# EAGLE board motorcontrol_v2 (EAGLE 6.5.0)
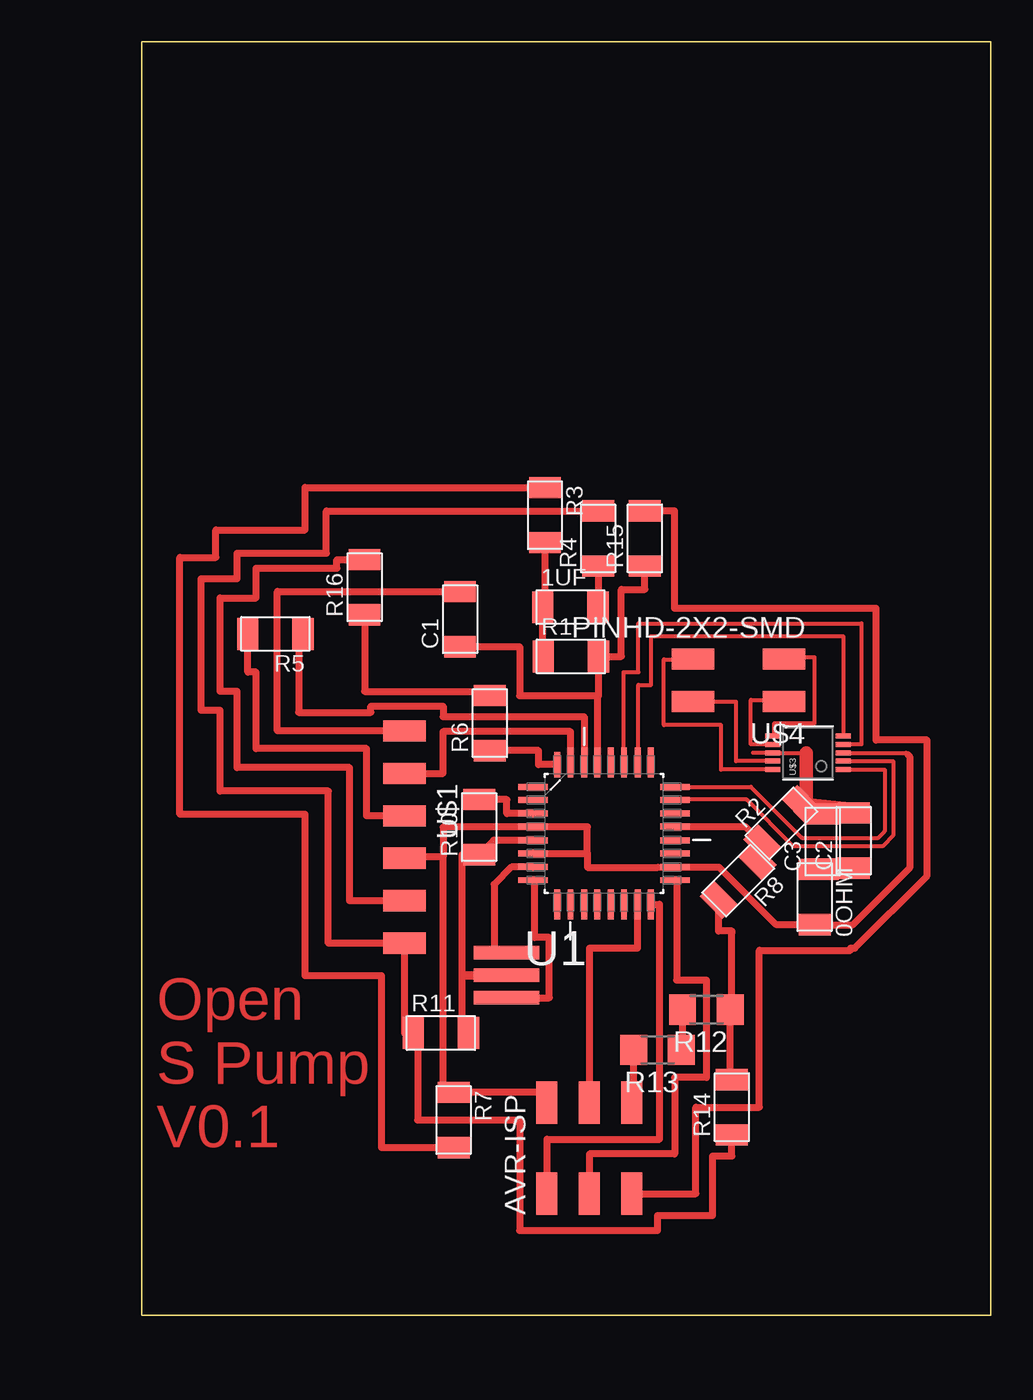
[diagram p0: board, top side]
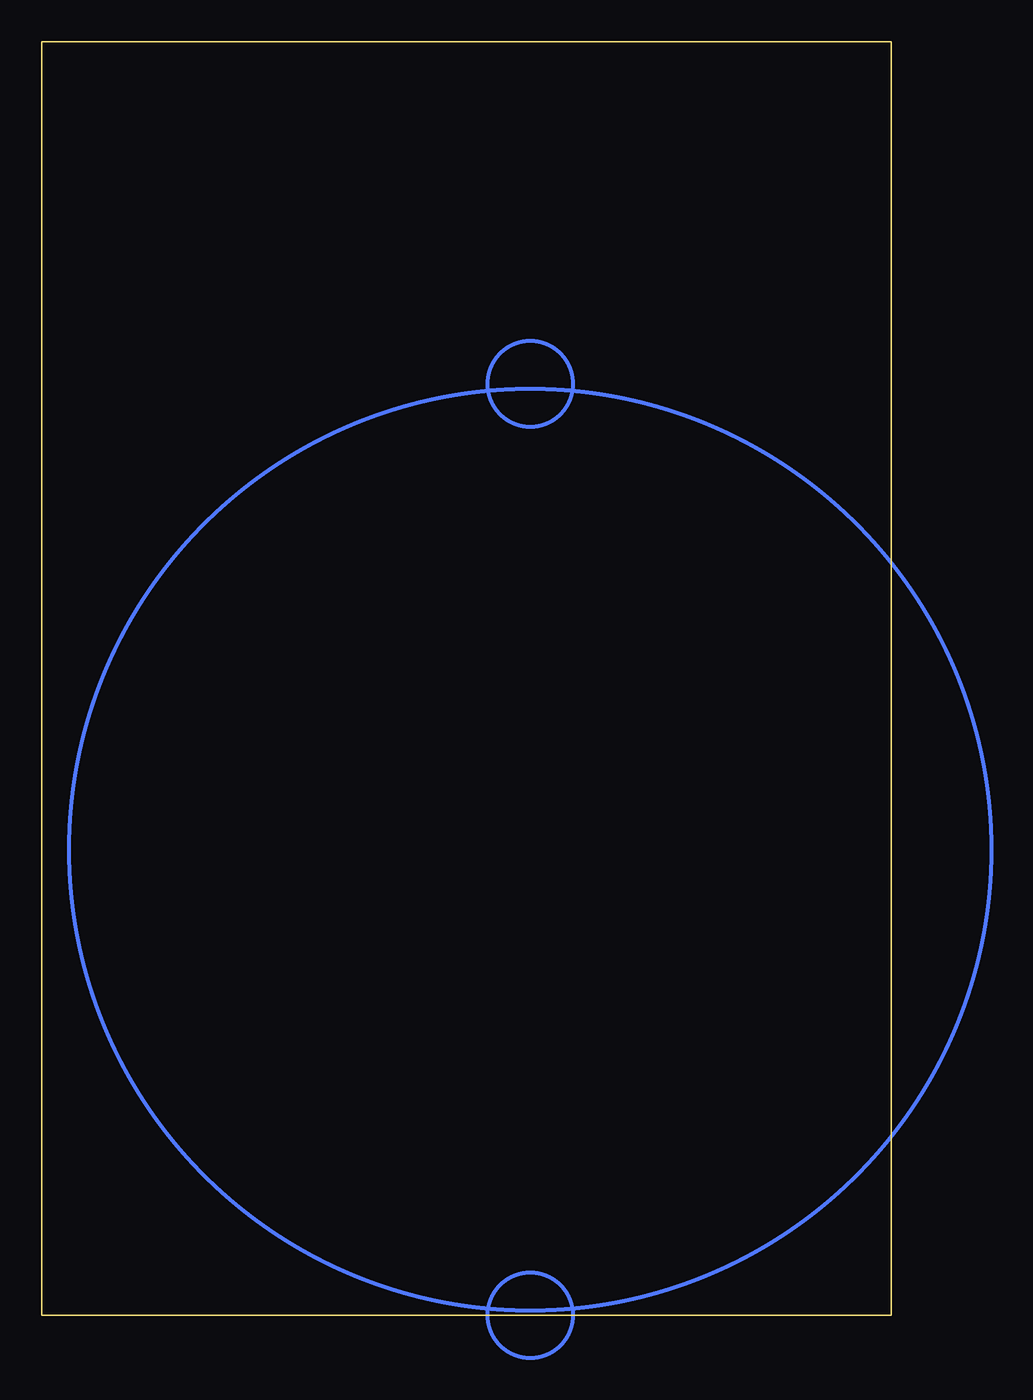
[diagram p1: board, bottom side, seen from below]

Size 50.8 x 76.2 mm. Coordinates in mm from the lower left corner, seen from the top.
Outline: 50.8,0 0,0 0,76.2 50.8,76.2 50.8,0
Copper layers (1*16): Top 0.035mm / dielectric 1.5mm / Bottom 0.035mm
Design rules "default *": minimum track width 10mil, minimum drill 24mil, track to track 16mil, track to pad 16mil, pad to pad 16mil, via to via 16mil, smd to smd 16mil, copper to edge 40mil, drill to drill 16mil, minimum pad ring 10mil, minimum via ring 8mil, stop-mask expansion 4mil, vias tented up to drill 0mil, thermal gap 10mil

## Footprints (pad centres in the part's own frame; a part is rotated, then mirrored left to right if it is on the bottom)
R1206FAB = smd 1.27 x 1.905: 1 -1.651,0; 2 1.651,0
C1206FAB = smd 1.27 x 1.905: 1 -1.651,0; 2 1.651,0
EFOBM = smd 0.8 x 3.9: 1 -1.35,0; 2 0,0; 3 1.35,0
2X03SMD = smd 2.54 x 1.27: 1 -2.54,2.54; 2 2.92,2.54; 3 -2.54,0; 4 2.92,0; 5 -2.54,-2.54; 6 2.92,-2.54
R1206 = smd 1.6 x 1.803: 1 -1.422,0; 2 1.422,0
QFP80P900X900X120-32N = smd 1.778 x 0.356: 1 -4.242,2.794; 2 -4.242,2.007; 3 -4.242,1.194; 4 -4.242,0.406; 5 -4.242,-0.406; 6 -4.242,-1.194; 7 -4.242,-2.007; 8 -4.242,-2.794; 17 4.242,-2.794; 18 4.242,-2.007; 19 4.242,-1.194; 20 4.242,-0.406; 21 4.242,0.406; 22 4.242,1.194; 23 4.242,2.007; 24 4.242,2.794 | smd 0.356 x 1.778: 9 -2.794,-4.242; 10 -2.007,-4.242; 11 -1.194,-4.242; 12 -0.406,-4.242; 13 0.406,-4.242; 14 1.194,-4.242; 15 2.007,-4.242; 16 2.794,-4.242; 25 2.794,4.242; 26 2.007,4.242; 27 1.194,4.242; 28 0.406,4.242; 29 -0.406,4.242; 30 -1.194,4.242; 31 -2.007,4.242 | smd 0.356 x 1.524: 32 -2.794,4.115
1X06SMD = smd 2.54 x 1.27: 1 0,6.35; 2 0,3.81; 3 0,1.27; 4 0,-1.27; 5 0,-3.81; 6 0,-6.35
MSOP_10 = smd 0.305 x 0.889: 1 -1,-2.11; 2 -0.5,-2.11; 3 0,-2.11; 4 0.5,-2.11; 5 1,-2.11; 6 1,2.11; 7 0.5,2.11; 8 0,2.11; 9 -0.5,2.11; 10 -1,2.11
2X02SMD = smd 2.54 x 1.27: 1 -2.54,1.27; 2 2.92,1.27; 3 -2.54,-1.27; 4 2.92,-1.27

## Placement (x,y rotation side)
0OHM  0  [R1206FAB]  40.26,25.02 270 top
1UF  1uF  [C1206FAB]  25.65,42.37 0 top
20MHZ  20MHZ  [EFOBM]  21.82,20.35 270 top
AVR-ISP  [2X03SMD]  26.78,9.82 90 top
C1  .1uF  [C1206FAB]  19.05,41.66 90 top
C2  .1uF  [C1206FAB]  42.6,28.4 90 top
C3  10uF  [C1206FAB]  40.74,28.35 90 top
R1  10K  [R1206FAB]  25.68,39.42 0 top
R2  0  [R1206FAB]  38.26,29.43 45 top
R3  0  [R1206FAB]  24.13,47.88 270 top
R4  0  [R1206FAB]  27.3,46.48 90 top
R5  0  [R1206FAB]  8,40.77 180 top
R6  0  [R1206FAB]  20.83,35.43 90 top
R7  0  [R1206FAB]  18.67,11.68 270 top
R8  0  [R1206FAB]  35.69,26.01 225 top
R10  0  [R1206FAB]  20.19,29.21 90 top
R11  0  [R1206FAB]  17.91,16.89 0 top
R12  0  [R1206]  33.78,18.29 180 top
R13  0  [R1206]  30.86,15.88 180 top
R14  0  [R1206FAB]  35.31,12.45 90 top
R15  0  [R1206FAB]  30.1,46.48 90 top
R16  0  [R1206FAB]  13.34,43.56 90 top
U1  ATMEGA328P-AU  [QFP80P900X900X120-32N]  27.66,28.83 0 top
U$1  FTDI-SMD-HEADER  [1X06SMD]  15.73,28.61 180 top
U$3  AD5290  [MSOP_10]  39.85,33.66 90 top
U$4  PINHD-2X2-SMD  [2X02SMD]  35.89,38 180 top

## Library data of the parts
0OHM 1UF 20MHZ AVR-ISP C1-C3 R1-R8 R10-R16 U$1 U$4 = fab
U1 = fab; DESCRIPTION: 8-bit Microcontroller with In-System Programmable Flash; MPN: ATMEGA328P-AU; OC_FARNELL: 1715486; OC_NEWARK: 14R4631; PACKAGE: TQFP-32; SUPPLIER: Atmel
U$3 = BillPorter

## Nets
CTS: R6.1 U1.32
GNA: 20MHZ.2 R10.1 R11.2 U1.5
GND: R4.2 R11.1 R14.1 U$1.1
GNDD: R8.2 R12.1 R14.2
GNDDD: R2.1 R8.1 U1.21
IN1A: U1.23 U$3.2
IN1B: U1.27 U$3.4
IN2A: U1.24 U$3.1
IN2B: U1.26 U$3.5
JUMP: AVR-ISP.5 R15.2
JUMP1: 0OHM.1 C2.1 C3.1
JUMP2: C2.2 C3.2 R2.2 U$3.8
MISO: AVR-ISP.1 U1.16
MOSI: AVR-ISP.4 U1.15
N$1: R5.2 U$1.4
N$2: R6.2 R16.1
N$3: 1UF.1 R1.1 R3.2
N$4: R3.1 R7.2
N$6: R10.2 U1.3
N$7: R16.2 U$1.2
N$8: AVR-ISP.6 R13.2
N$10: C1.2 U$1.6
N$12: 1UF.2 R4.1
N$13: R12.2 R13.1
OUT1A: U$3.6 U$4.3
OUT1B: U$3.9 U$4.2
OUT2A: U$3.7 U$4.1
OUT2B: U$3.10 U$4.4
R1: 20MHZ.1 U1.7
R2: 20MHZ.3 U1.8
RST: C1.1 R1.2 R15.1 U1.29
RX: R5.1 U1.30
SCK: AVR-ISP.3 U1.17
TX: U1.31 U$1.5
VCC: 0OHM.2 AVR-ISP.2 R7.1 U1.4 U1.6 U1.18 U$1.3 U$3.3

## Tracks (layer width: path | path; a pad name or v marks a point on that pad's centre or on a via)
CTS
  Top 0.406: U1.32 23.75,32.94 23.75,33.78 R6.1
GNA
  Top 0.406: U1.5 21.06,28.42 R10.1 19.18,27.56 19.18,20.35 | R11.2 19.18,16.89 19.18,20.32 | 19.18,20.32 21.82,20.32 20MHZ.2 19.18,20.35 | 19.18,20.35 19.18,20.32
GND
  Top 0.406: R4.2 11.05,48.13 11.05,45.59 5.71,45.59 5.71,44.07 3.56,44.07 3.56,36.2 4.7,36.2 4.7,31.37 11.18,31.37 11.18,22.26 U$1.1 15.73,16.89 R11.1 16.51,16.89 16.51,11.68 22.61,11.68 22.61,5.08 30.86,5.08 30.86,5.97 34.16,5.97 34.16,9.53 35.31,9.53 R14.1
GNDD
  Top 0.406: R14.2 35.2,14.1 R12.1 35.31,18.29 35.31,22.99 | 35.31,22.99 35.28,22.73 | 35.31,22.99 34.52,22.99 R8.2
GNDDD
  Top 0.406: R2.1 36.85,28 | R8.1 37.1,27.18 R2.1 | U1.21 36.12,29.23 R2.1
IN1A
  Top 0.254: U$3.2 44.95,33.16 44.96,33.15 44.96,28.7 44.32,28.07 38.99,28.07 36.2,30.86 31.93,30.86 U1.23
IN1B
  Top 0.254: U1.27 28.83,33.07 28.83,38.48 29.72,38.48 29.72,41.4 43.05,41.4 43.05,34.16 U$3.4
IN2A
  Top 0.254: U$3.1 44.45,32.66 44.45,28.96 44.07,28.57 39.5,28.57 36.45,31.62 U1.24
IN2B
  Top 0.254: U1.26 29.72,33.07 29.72,37.72 30.48,37.72 30.48,40.64 41.96,40.64 U$3.5
JUMP
  Top 0.406: AVR-ISP.5 33.15,7.28 33.15,12.45 36.96,12.45 36.96,21.84 42.42,21.84 42.42,21.97 42.67,21.97 46.99,26.29 46.99,34.42 43.94,34.42 43.94,42.29 31.88,42.29 31.88,48.13 R15.2
JUMP1
  Top 0.61: C3.1 42.55,26.7 C2.1 42.6,26.72 0OHM.1
JUMP2
  Top 0.254: 36.58,33.66 U$3.8 39.75,33.66
  Top 0.813: C2.2 42.98,30.23 R2.2 40.87,30.23 C3.2 39.75,30.5 39.75,33.66
MISO
  Top 0.406: AVR-ISP.1 24.26,7.28 24.26,10.54 30.99,10.54 30.99,24.59 U1.16
MOSI
  Top 0.406: AVR-ISP.4 26.8,12.74 26.8,21.97 29.67,21.97 U1.15
N$1
  Top 0.406: U$1.4 13.46,29.88 13.46,33.91 6.86,33.91 6.86,38.48 6.35,38.48 R5.2
N$2
  Top 0.406: R16.1 13.34,37.34 20.83,37.34 R6.2
N$3
  Top 0.406: R1.1 24,39.42 1UF.1 24.13,42.37 R3.2
N$4
  Top 0.406: R7.2 14.35,10.03 14.35,20.32 9.78,20.32 9.78,29.97 2.29,29.97 2.29,45.34 4.45,45.34 4.45,46.99 9.78,46.99 9.78,49.53 R3.1
N$6
  Top 0.406: U1.3 21.84,30.02 21.84,30.86 R10.2
N$7
  Top 0.406: U$1.2 12.45,24.8 12.45,32.77 5.71,32.77 5.71,37.34 4.7,37.34 4.7,42.93 6.86,42.93 6.86,44.7 11.68,44.7 11.68,45.21 R16.2
N$8
  Top 0.406: AVR-ISP.6 29.44,12.74 R13.2
N$10
  Top 0.406: U$1.6 8.13,34.96 8.13,43.31 C1.2
N$12
  Top 0.406: R4.1 1UF.2
N$13
  Top 0.406: R13.1 32.36,15.88 R12.2
OUT1A
  Top 0.254: U$3.6 37.85,34.66 37.85,35.43 40.26,35.43 40.26,39.37 38.43,39.37 U$4.3
OUT1B
  Top 0.254: U$3.9 35.56,33.16 35.56,36.7 32.97,36.7 U$4.2
OUT2A
  Top 0.254: U$3.7 36.45,34.16 36.45,36.83 38.43,36.83 U$4.1
OUT2B
  Top 0.254: U$3.10 34.67,32.66 34.67,35.31 31.24,35.31 31.24,39.24 32.97,39.24 U$4.4
R1
  Top 0.406: U1.7 22.12,26.82 21.08,25.78 21.08,21.84 20.95,21.72 21.81,21.72 20MHZ.1
R2
  Top 0.406: U1.8 23.5,26.04 23.5,22.61 24.38,22.61 24.38,19 20MHZ.3
RST
  Top 0.406: C1.1 22.61,40.01 22.61,37.08 27.25,37.08 | 27.3,37.08 27.33,37.08 R1.2 | R1.2 27.3,39.42 27.3,37.08 | 27.3,37.08 27.25,37.08 | 27.25,37.08 U1.29 | R1.2 28.7,39.42 28.7,43.43 30.1,43.43 R15.1
RX
  Top 0.406: R5.1 9.4,40.77 9.4,36.07 13.72,36.07 13.72,36.45 18.03,36.45 18.03,35.81 26.47,35.81 U1.30
SCK
  Top 0.406: U1.17 32,26.04 32,20.07 33.78,20.07 33.78,14.22 31.88,14.22 31.88,9.65 26.78,9.65 AVR-ISP.3
TX
  Top 0.406: U$1.5 18.03,32.42 18.03,34.92 25.65,34.92 U1.31
VCC
  Top 0.254: U$3.3 45.72,33.66 45.85,33.53
  Top 0.406: U1.6 26.67,27.64 | 26.67,27.64 26.67,26.8 30.89,26.8 U1.18 31.93,26.8 34.54,26.8 37.97,23.37 0OHM.2 42.55,23.37 45.97,26.8 45.97,33.4 45.85,33.53 | U1.4 26.67,29.23 26.67,29.21 | AVR-ISP.2 24,12.74 24,13.34 R7.1 18.03,13.34 18.03,27.43 | 26.67,27.64 26.67,29.21 | 26.67,29.21 18.03,29.21 18.03,27.43 | 18.03,27.43 15.73,27.43 U$1.3
(copper drawn outside any net)
  shapes: Bottom circle x3

## Text on the board
Top: Open / S Pump / V0.1